# Altium PCB budzik.PcbDoc
Units mil, origin at the board's own origin, x right, y up, seen from the top; angles counter-clockwise.
Board outline 2204.72 x 2598.43 mil, 2 copper layers (Top Layer, Bottom Layer); 40 components, 44 nets, 162 pads, 33 vias.
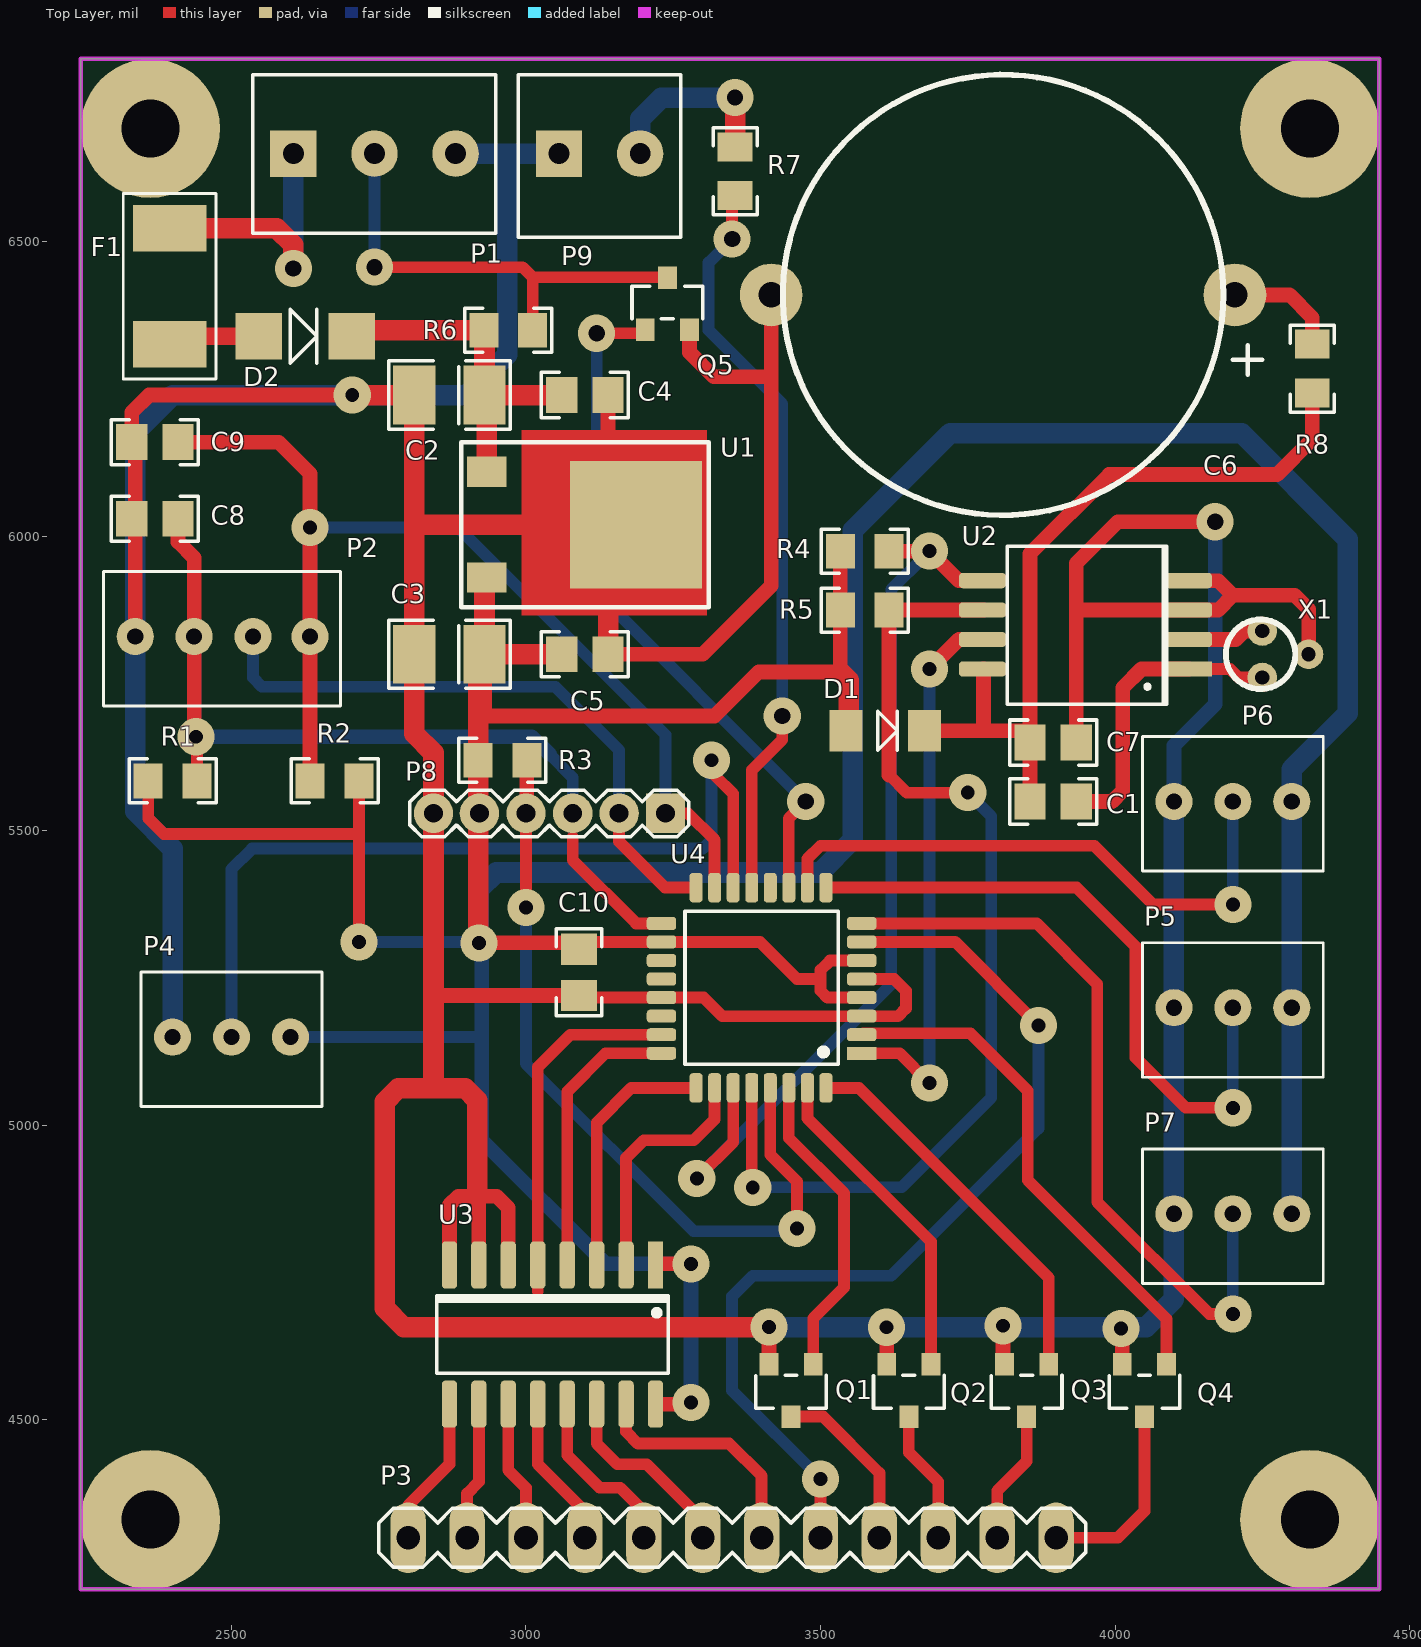
[diagram p0: Top Layer view]
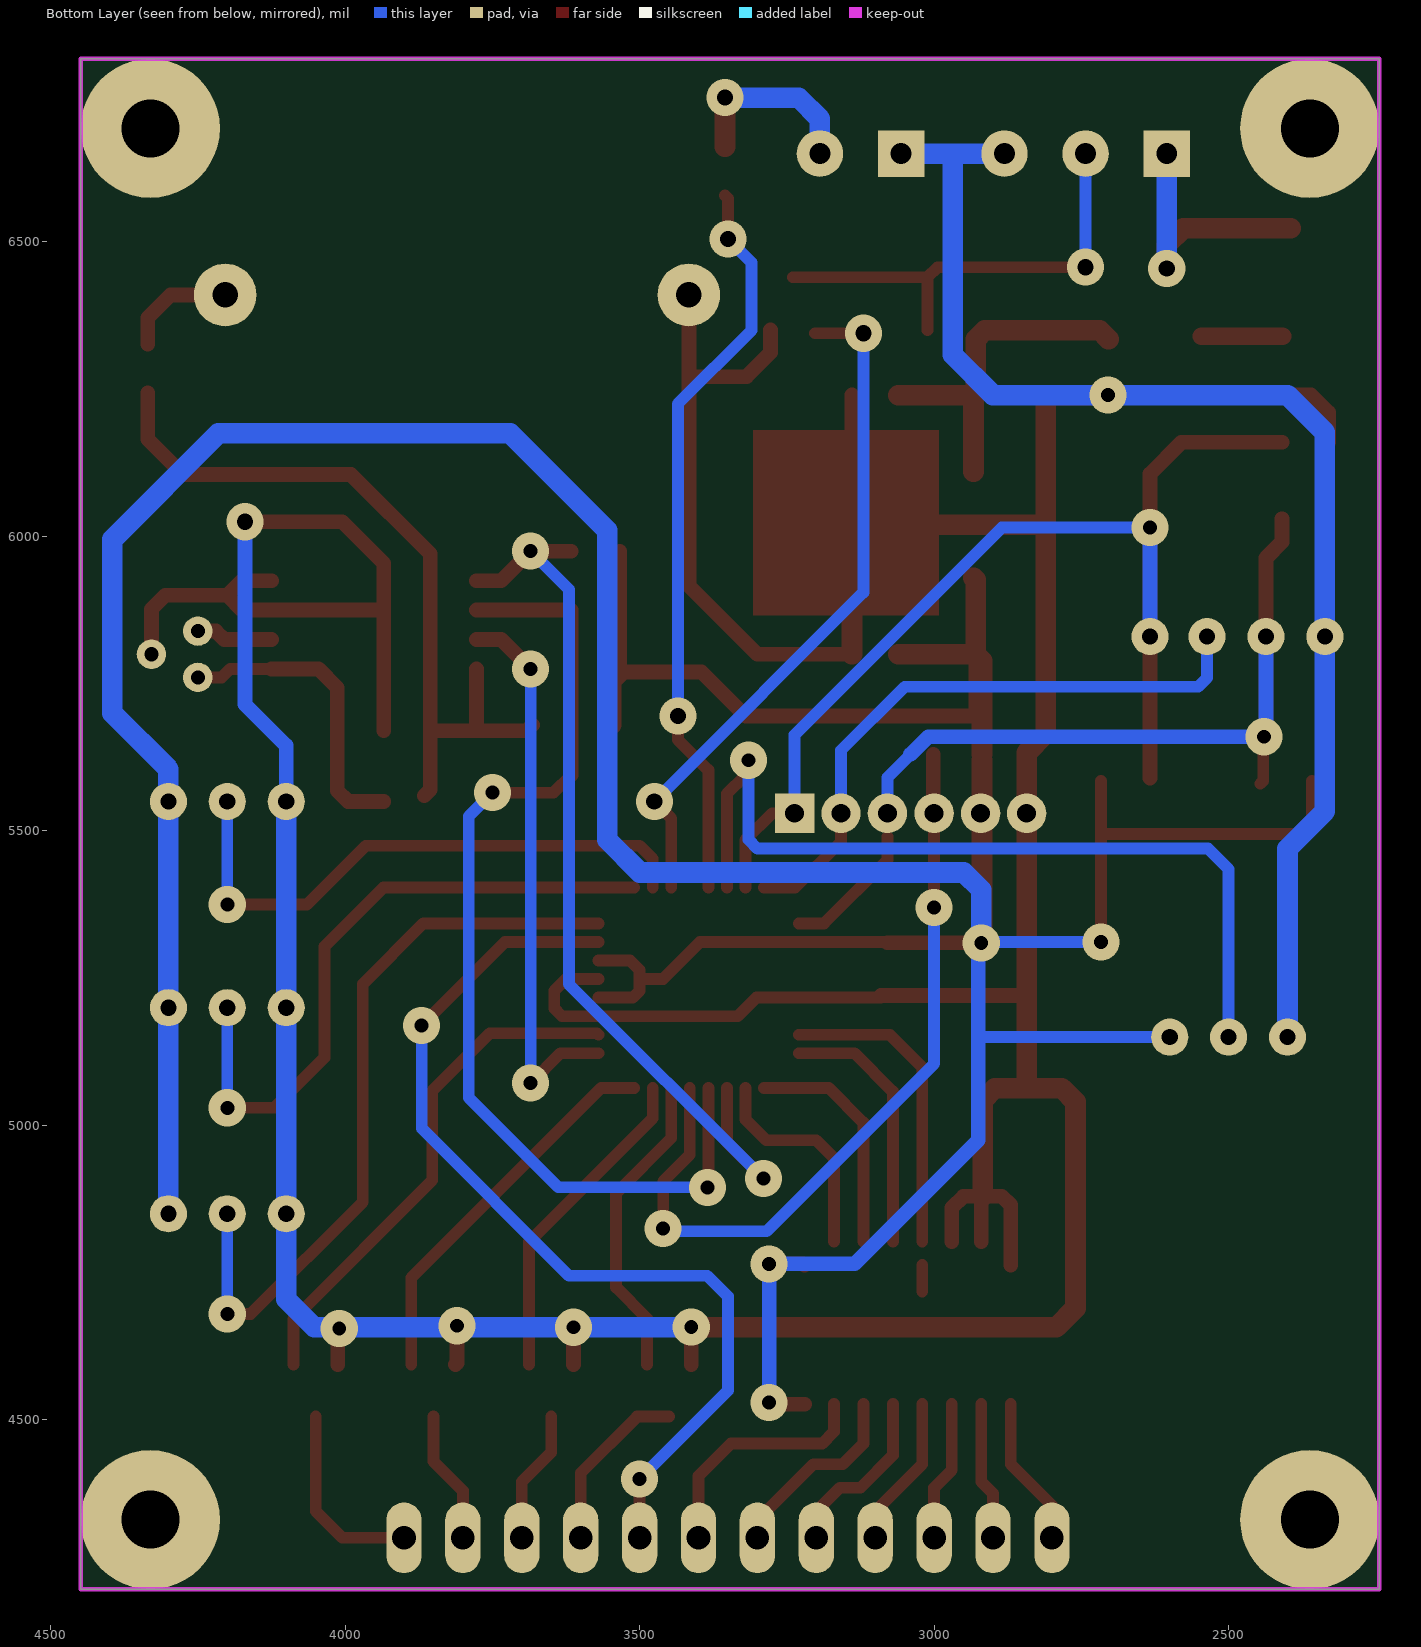
[diagram p1: Bottom Layer view, seen from below]

## Layer stack, top to bottom
Top Layer: signal copper 1.4
Dielectric: dielectric 12.6, FR-4, Dk 4.8
Bottom Layer: signal copper 1.4

## Board outline
2244.09,4212.6 4448.82,4212.6 4448.82,6811.02 2244.09,6811.02

## Design rules (kind name [scope] priority, off if disabled: settings)
Clearance [All] p1: gap=8
PolygonConnect [All] p1: connectstyle=Relief reliefconductorwidth=10 reliefentries=4 polygonreliefangle="90 Angle" airgapwidth=10
RoutingVias [All] p1: holewidth=27.56 width=62.99 viastyle="Through Hole" minholewidth=27.56 minwidth=62.99 maxholewidth=27.56 maxwidth=62.99
SolderMaskExpansion [All] p1: expansion=4
Width [All] p1: maxlimit=35 minlimit=20 preferedwidth=25 minimp=50.000000 maximp=50.000000 favimp=50.000000
28 further rules are at their usual default settings.

## Components (designator, comment, footprint, x,y, rotation, side; value= is the part's Value field where it differs from the comment)
C1 "22pF" C0805 3895,5550 r0 top
C2 "4,7uF" TANC_B 2870,6240 r180 top
C3 "10uF" TANC_B 2870,5800 r180 top
C4 "100nF" C0805 3100,6240 r0 top
C5 "100nF" C0805 3100,5800 r0 top
C6 "1.5F/5.5V" EECS5R5H155 3810,6410 r180 top
C7 "100nF" C0805 3895,5650 r0 top
C8 "100nF" C0805 2370,6030 r180 top
C9 "100nF" C0805 2370,6160 r180 top
C10 "100nF" C0805 3090,5260 r270 top
D1 "LL101A-GS08" SOD80C 3610,5670 r180 top
D2 "M4" SMA 2625,6340 r180 top
F1 "0679-0500-01" 0679-0500-01 2395,6425 r270 top
P1 "ARK 3-Pin" ARK-3.5mm-3pin 2605,6650 r0 top
P2 "NS25-W4P" NS25-W4P 2485,5830 r0 top
P3 "Header 12" MA12-1L 3350,4300 r0 top
P4 "NS25-W3P" NS25-W3P 2500,5150 r0 top
P5 "NS25-W3P" NS25-W3P 4200,5200 r0 top
P6 "NS25-W3P" NS25-W3P 4200,5550 r0 top
P7 "NS25-W3P" NS25-W3P 4200,4850 r0 top
P8 "Header 6 2mm" MA06-1_2mm 3040,5530 r180 top
P9 "ARK 2-Pin" ARK-3.5mm-2pin 3125,6650 r0 top
Q1 "2N7002" SOT23 3450,4550 r180 top
Q2 "2N7002" SOT23 3650,4550 r180 top
Q3 "2N7002" SOT23 3850,4550 r180 top
Q4 "2N7002" SOT23 4050,4550 r180 top
Q5 "2N7002" SOT23 3240,6395 r0 top
R1 "10K" R0805 2400,5585 r180 top
R2 "10K" R0805 2675,5585 r0 top
R3 "10K" R0805 2960,5620 r0 top
R4 "10K" R0805 3575,5975 r180 top
R5 "10K" R0805 3575,5875 r180 top
R6 "10K" R0805 2970,6350 r180 top
R7 "330R" R0805 3355,6620 r90 top
R8 "100R" R0805 4335,6285 r90 top
U1 "MC7805CDTG" TO-252 3060,6020 r270 top
U2 "PCF8583" SO-8T 3950,5850 r180 top
U3 "MC14543BDG" SO-16 3045,4645 r270 top
U4 "ATmega8-AU/MU" TQFP-32A 3400,5233.78 r180 top
X1 "32.768 KHz" TC26_V 4250,5800 r270 top

## Footprints (in the part's own frame and the unit in brackets; to place one, negate y for a bottom-side part, rotate by r counter-clockwise, add the part's x,y. Pads: shape width x height; smd on the part's side, far side on the other; paste and mask are expansions set on the pad)
0679-0500-01 [mm]
  rect 2x3.18 smd: 1(-2.5,0) 2(2.5,0)
  silkscreen extent -4,-2 4,2, body extent -3.05,-1.3 3.05,1.39, height 2.69
ARK-3.5mm-2pin [mm]
  rect 2x2 hole 0.9: 1(-1.75,0)
  round 2 hole 0.9: 2(1.75,0)
  silkscreen extent -3.5,-3.6 3.5,3.4, body extent -3.5,-3.6 3.5,3.4, height 8.4
ARK-3.5mm-3pin [mm]
  rect 2x2 hole 0.9: 1(0,0)
  round 2 hole 0.9: 2(3.5,0) 3(7,0)
  silkscreen extent -1.75,-3.43 8.73,3.4, body extent -1.76,-3.43 8.74,3.47, height 2.1
C0805 [mm] "Chip Capacitor, Body 2.0x1.2mm, Height 1.3mm, IPC Low Density"
  rect 1.35x1.55 smd: 1(-1,0) 2(1,0)
  silkscreen extent -1.88,-0.97 1.88,0.97, body extent -1.1,-0.72 1.1,0.72, height 1.3
EECS5R5H155 [mm] "1,5F; 5,5VDC; O20,5x6,5mm"
  round 2.7 hole 1.1: 1(-10,0) 2(10,0)
  silkscreen extent -11.18,-9.5 9.5,9.5, body extent -10,-9.48 10.1,9.48, height 6.2
MA06-1_2mm [mm]
  rect 1.7x1.7 hole 0.813: 1(-5,0)
  round 1.7 hole 0.813: 2(-3,0) 3(-1,0) 4(1.016,0) 5(3.023,0) 6(5.004,0)
  silkscreen extent -6,-1 6.02,1.02
MA12-1L [mil]
  oval 60x120 hole 40: 1(-550,0) 2(-450,0) 3(-350,0) 4(-250,0) 5(-150,0) 6(-50,0) 7(50,0) 8(150,0) 9(250,0) 10(350,0) 11(450,0) 12(550,0)
  silkscreen extent -600,-50 600,50, body extent -600,-50 600,50, height 339
NS25-W3P [mm]
  round 1.6 hole 0.7: 1(-2.54,0) 2(0,0) 3(2.54,0)
  silkscreen extent -3.9,-3 3.9,2.8, body extent -3.9,-3 3.9,2.8, height 11.5
NS25-W4P [mm]
  round 1.6 hole 0.7: 1(-3.77,0) 2(-1.23,0) 3(1.31,0) 4(3.77,0)
  silkscreen extent -5.13,-3 5.08,2.8, body extent -5.13,-3 5,2.8, height 11.5
R0805 [mm] "Chip Resistor, Body 2.0x1.3mm, IPC Low Density"
  rect 1.25x1.5 smd: 1(-1.05,0) 2(1.05,0)
  silkscreen extent -1.88,-0.95 1.88,0.95, body extent -1.1,-0.67 1.1,0.67, height 0.7
SMA [mil]
  rect 79x79 smd: 1(-78.87,0) 2(78.87,0)
  silkscreen extent -20,-46 26,46, body extent -98,-53 98,53, height 87
SO-8T [mil]
  rect 80x26 smd: 1(-175,75)
  rrect50% 80x26 smd: 2(-175,25) 3(-175,-25) 4(-175,-75) 5(175,-75) 6(175,-25) 7(175,25) 8(175,75)
  silkscreen extent -138,-133 133,135, body extent -204,-151 204,151, height 110
SO-16 [mil]
  rect 80x26 smd: 1(-118.11,175)
  rrect50% 80x26 smd: 2(-118.11,125) 3(-118.11,75) 4(-118.11,25) 5(-118.11,-25) 6(-118.11,-75) 7(-118.11,-125) 8(-118.11,-175) 9(118.11,-175) 10(118.11,-125) 11(118.11,-75) 12(118.11,-25) 13(118.11,25) 14(118.11,75) 15(118.11,125) 16(118.11,175)
  silkscreen extent -66,-197 66,197, body extent -121,-196 121,196, height 68
SOD80C [mil]
  rect 56x71 smd: 1(-66.96,0) 2(66.96,0)
  silkscreen extent -20,-33 13,33, body extent -69,-30 69,30, height 59
SOT23 [mil]
  rect 32x38 smd: 1(-37.6,-44.33) 2(37.6,-44.33) 3(0,44.33)
  silkscreen extent -60,-26 60,30, body extent -57,-49 57,48, height 40
TANC_B [mil]
  rect 72x100 smd: 1(-59.53,0) 2(59.53,0)
  silkscreen extent -103,-58 103,58, body extent -69,-55 70,55, height 75
TC26_V [mil]
  round 50 hole 24: 1(-39.37,0) 2(39.37,0) 3(0,78.74)
  silkscreen extent -59,-62 59,56, body extent -59,-62 59,56, height 315
TO-252 [mm]
  rect 1.3x1.7 smd: 1(-2.285,-3.22) 3(2.285,-3.22)
  rect 5.5x5.7 smd: 2(0,3.22)
  silkscreen extent -3.56,-4.32 3.56,6.35, body extent -3.29,-3.95 3.29,5.75, height 2.3
TQFP-32A [mil]
  rect 50x22 smd: 1(-170,111.22)
  rrect50% 50x22 smd: 2(-170,79.72) 3(-170,48.23) 4(-170,16.73) 5(-170,-14.76) 6(-170,-46.26) 7(-170,-77.76) 8(-170,-109.25) 17(170,-109.25) 18(170,-77.76) 19(170,-46.26) 20(170,-14.76) 21(170,16.73) 22(170,48.23) 23(170,79.72) 24(170,111.22)
  rrect50% 22x50 smd: 9(-109.25,-170) 10(-77.76,-170) 11(-46.26,-170) 12(-14.76,-170) 13(16.73,-170) 14(48.23,-170) 15(79.72,-170) 16(111.22,-170) 25(111.22,170) 26(79.72,170) 27(48.23,170) 28(16.73,170) 29(-14.76,170) 30(-46.26,170) 31(-77.76,170) 32(-109.25,170)
  silkscreen extent -130,-130 130,130, body extent -180,-180 182,182, height 47

## Part data
C1 C4 C5 C7 C8 C9 C10: library part Cap, "Capacitor"
C2 C3 C6: library part Cap_Pol, "Capacitor Polarized"
D1: library part "Diode Shottky"
D2: library part Diode
F1: "Bezpiecznik: topikowy; szybki; ceramiczny; 500mA; 125VAC; 125VDC"
P3: "Header, 12-Pin"
P8: library part "Header 6", "Header, 6-Pin"
Q1 Q2 Q3 Q4 Q5: library part 2N7002(GSD), "N-MOSFET"
R1 R2 R3 R4 R5 R6 R7 R8: library part Res, "Resistor"
U1: library part 78xx
U3: "BCD na 7 segmentowy"
U4: "TQFP - 32pin / MLF - 32pin"
X1: library part "Crystal _GND"

## Free pads (board coordinates)
  round 236.22 hole 98.43: M(2362.2,4330.71) M(2362.2,6692.91) M(4330.71,4330.71) M(4330.71,6692.91)

## Via types
v1: diameter 62.99, hole 23.62, Top Layer to Bottom Layer, 25 vias
v2: diameter 62.99, hole 27.56, Top Layer to Bottom Layer, 8 vias

## Nets (pads, with @x,y where several pads share a name; then routed paths per layer and width w, separated by ;. In a path a pad name is that pad's centre, name@x,y a point inside that pad or via, vN(x,y) a via of type N, cw(c..) or ccw(c..) an arc to the next point about the centre after c; other vN are vias at no path point)
5V: C3.1 C5.1 C10.1 D1.2 P4.3 P5.3 P6.3 P7.3 P8.5 R1.2 R2.2 R3.1 R4.2 R5.2 U1.3 U3.1 U3.16 U4.4 U4.6 U4.18 | length 8538.1
  Top Layer w20: R1.2 2358.66,5521.34 2385,5495 2711.34,5495 ; v1(2716.54,5311.54) R2.2@2716.54,5584.8 ; R3.1@2921,5620 R3.1@2921,5627.66 ; C10.1@3079.37,5311.54 U4.18 3397.24,5311.54 3460,5248.78 3500,5248.78 ; U4.4 3511.73,5217.05 3500,5228.78 3500,5248.78 ; U4.6 3516.26,5280.04 3500,5263.78 3500,5248.78
  Top Layer w25: R3.1@2918.66,5630 R3.1@2921,5627.66 ; v1(2920,5310) C10.1@3079.37,5310 ; U1.3 2933.23,5803.7 C3.1 2929.53,5695 3320,5695 3395,5770 3533.66,5770 R4.2 ; U3.16 3276.89,4526.89 v1(3280,4530) ; U3.1 3221.89,4765 v1(3280,4765)
  Top Layer w35: R3.1 2918.66,5321.34 v1@2925,5315 ; R3.1@2918.66,5630 2918.66,5789.13 C3.1 ; U1.3 2929.53,5926.34 C3.1 ; C5.1 C3.1 ; 3533.66,5770 3548.04,5755.63 D1.2@3548.04,5680
  Bottom Layer w20: P4.3 2925,5150 ; v1(2716.54,5311.54) 2920,5311.54 v1@2925,5311.54
  Bottom Layer w25: v1@2925,5311.54 2925,5150 2925,4975 3135,4765 v1(3280,4765) ; v1(3280,4530) v1@3280,4760
  Bottom Layer w35: v1(2920,5310) 2920,5311.54 2920,5400 2949.5,5429.5 3499.5,5429.5 3555,5485 3555,6010 3720,6175 4215,6175 4395,5995 4395,5700 4300,5605 P6.3 P5.3 P7.3
12V: C2.1 C4.1 D2.1 R6.2 U1.1 | length 595.5
  Top Layer w35: D2.1@2703.87,6335 2718.87,6350 2914.05,6350 2929.53,6334.53 C2.1 ; U1.1 2933.23,6236.3 C2.1 ; C4.1 C2.1
A: U3.5 U4.23 | length 573.7
  Top Layer w20: 3020,4718.11 U3.5 ; 3020,4803.11 3020,5099.06 3075,5154.06 U4.23
B: U3.2 U4.26 | length 372.7
  Top Layer w20: 3170,4803.11 3170,4945 3200,4975 3285,4975 3320.28,5010.28 U4.26
C: U3.3 U4.25 | length 395
  Top Layer w20: 3120,4803.11 3120,5005 3178.78,5063.78 U4.25
CC1: Q4.1 U4.2 | length 885.7
  Top Layer w20: U4.2 3572.44,5156.5 3754.5,5156.5 3852,5059 3852,4907 4087.6,4671.4 Q4.1
CC2: Q3.1 U4.32 | length 659
  Top Layer w20: U4.32 3565.22,5063.78 3887.6,4741.4 Q3.1
CC3: Q2.1 U4.31 | length 556.4
  Top Layer w20: U4.31 3477.76,5012.24 3687.6,4802.4 Q2.1
CC4: Q1.1 U4.30 | length 530
  Top Layer w20: U4.30 3446.26,4978.74 3540,4885 3540,4725 3487.6,4672.6 Q1.1
D: U3.4 U4.24 | length 441.4
  Top Layer w20: 3070,4803.11 3070,5057.56 3135,5122.56 U4.24
DP: P3.8 U4.7 | length 1643.8
  Top Layer w20: P3.8 v1(3500,4400) ; U4.7 3728.46,5311.54 v1(3870,5170)
  Bottom Layer w20: v1(3500,4400) 3350,4550 3350,4710 3385,4745 3620,4745 3870,4995 v1(3870,5170)
EN_A: C9.1 P2.4 P8.1 R2.1 U4.15 | length 2013.4
  Top Layer w20: v1@2633.43,5995 v1(2633.43,6015) ; P8.1 3275,5530 3320.28,5484.72 U4.15
  Top Layer w25: C9.1 2580,6160 2633.43,6106.57 v1(2633.43,6015) ; R2.1@2633.43,5589.76 P2.4 v1@2633.43,5995
  Bottom Layer w20: v1(2633.43,6015) 2885,6015 3236.85,5663.15 P8.1
  Bottom Layer w25: P2.4 v1(2633.43,6015)
EN_B: C8.1 P2.2 P8.3 R1.1 U4.17 | length 1595.2
  Top Layer w20: v1@2436.57,5663.43 2441.34,5658.66 R1.1 R1.1@2446.34,5580 ; 3079.37,5490 3079.37,5450.63 3186.97,5343.03 U4.17
  Top Layer w25: C8.1 2409.37,5990.63 2436.57,5963.43 P2.2 v1@2436.57,5663.43
  Bottom Layer w20: 3040,5630 3079.37,5590.63 P8.3
  Bottom Layer w25: v1@2436.57,5663.43 P2.2 ; v1(2440,5660) 3010,5660 3040,5630
EN_SW: P2.3 P8.2 U4.16 | length 1060.6
  Top Layer w20: P8.2 3158.11,5481.89 3236.22,5403.78 U4.16
  Bottom Layer w20: P2.3 2536.57,5760 2551.57,5745 3050,5745 3158.11,5636.89 P8.2
GND: C2.2 C3.2 C4.2 C5.2 C6.2 C7.2 C8.2 C9.2 C10.2 P1.3 P2.1 P4.1 P5.1 P6.1 P7.1 P8.6 P9.1 Q1.2 Q2.2 Q3.2 Q4.2 Q5.2 U1.2 U2.3 U2.4 U3.6 U3.7 U3.8 U4.3 U4.5 U4.21 X1.3 | length 12315.1
  Top Layer w20: C10.2@3090,5217.05 U4.21 3301.73,5217.05 3333.23,5185.55 U4.3 3631.77,5185.55 3645,5198.78 3645,5228.78 3625.24,5248.54 U4.5
  Top Layer w25: P2.1 2336.57,6154.06 C9.2 2330.63,6210.63 2360,6240 v1(2705,6240) ; 2843,5220 2843.63,5220.63 C10.2 ; U3.8 2870,4865 2885,4880 2917.5,4880 ; 2920,4803.11 2920,4877.5 2917.5,4880 ; 2970,4803.11 2970,4860 2950,4880 2917.5,4880 ; C5.2 3300,5800 3416.3,5916.3 3416.3,6271.3 ; U1.2@3139.37,5972.6 U1.2 ; U1.2@3139.37,6067.4 C4.2 ; Q5.2 3277.6,6312.4 3318.7,6271.3 3416.3,6271.3 ; Q1.2 v1(3412.4,4657.6) ; C6.2 3416.3,6271.3 ; Q2.2 v1(3612.4,4657.4) ; v1(3810,4660) 3810,4596.73 Q3.2 ; C7.2@3934.37,5670 3934.37,5880 ; v1(4010,4655) 4012.4,4652.6 Q4.2 ; U2.4 4175,5925 4200,5900 ; v2(4170,6025) 4005,6025 3934.37,5954.37 3934.37,5880 ; X1.3 4328.74,5876.26 4305,5900 4200,5900 ; 3934.37,5880 3939.37,5875 U2.3 4175,5875 4200,5900
  Top Layer w35: v1(2705,6240) C2.2 2810.47,6020 ; 2917.5,4880 2917.5,5042.5 2897,5063 2843,5063 ; C5.2 U1.2@3139.37,5972.6 ; v1(3412.4,4657.6) 2792.4,4657.6 2760,4690 2760,5040 2783,5063 2843,5063 ; 2810.47,6020 C3.2 2810.47,5665 2843,5632.47 P8.6 2843,5220 2843,5063 ; 2810.47,6020 U1.2@3139.37,6020 ; U1.2@3139.37,6020 U1.2 3139.37,6067.4 U1.2@3139.37,6020
  Bottom Layer w25: P6.1 4100,5645 4170,5715 v2(4170,6025)
  Bottom Layer w35: P4.1 2400,5470 2336.57,5533.43 P2.1 2336.57,6176.57 2400,6240 v1(2705,6240) 2900,6240 2968.35,6308.35 2968.35,6650 ; P1.3 2968.35,6650 ; P9.1 2968.35,6650 ; v1(3412.4,4657.6) 4052.6,4657.6 4100,4705 P7.1 P5.1 P6.1
INT: U2.7 U4.1 | length 951.5
  Top Layer w20: U4.1 3634.44,5122.56 v1(3685,5072)
  Top Layer w25: v1(3685,5775) 3735,5825 U2.7@3776.89,5825
  Bottom Layer w20: v1(3685,5072) v1(3685,5775)
LED: P7.2 U4.8 | length 1291.4
  Top Layer w20: U4.8 3866.97,5343.03 3970,5240 3970,4870 4160,4680 v1(4200,4680)
  Bottom Layer w20: v1(4200,4680) P7.2
NetC1_1: C1.1 C7.1 D1.1 R8.1 U2.8 | length 1336.1
  Top Layer w25: D1.1@3681.96,5680 3691.96,5670 3776.89,5670 ; U2.8@3776.89,5775 3776.89,5670 ; C1.1@3865.63,5560 3855.63,5570 C7.1@3855.63,5670 ; R8.1 4335,6165 4275,6105 3990,6105 3855.63,5970.63 C7.1@3855.63,5670 ; 3776.89,5670 C7.1@3855.63,5670
NetC1_2: C1.2 U2.1 X1.2 | length 517.3
  Top Layer w20: U2.1 4195,5775 4209.37,5760.63 X1.2
  Top Layer w25: C1.2 3995,5550 4013.11,5568.11 4013.11,5743.11 4045,5775 U2.1
NetC6_1: C6.1 R8.2 | length 199.4
  Top Layer w20: C6.1@4205,6405 C6.1@4210,6410
  Top Layer w25: C6.1 4210,6410 4296.34,6410 4335,6371.34 R8.2
NetD2_2: D2.2 F1.2 | length 142.7
  Top Layer w20: D2.2@2546.13,6335 D2.2
  Top Layer w30: F1.2@2408.43,6340 D2.2
NetF1_1: F1.1 P1.1 | length 456.8
  Top Layer w35: F1.1 2576.57,6523.43 2605,6495 v2(2605,6455)
  Bottom Layer w35: v2(2605,6455) P1.1
NetP3_1: P3.1 U3.9 | length 312.8
  Top Layer w20: P3.1 2800,4355 2870,4425 U3.9 2870,4470
NetP3_2: P3.2 U3.10 | length 235.2
  Top Layer w20: P3.2 2900,4375 2920,4395 U3.10
NetP3_3: P3.3 U3.11 | length 239.3
  Top Layer w20: U3.11 2970,4415 3000,4385 P3.3
NetP3_4: P3.4 U3.12 | length 260
  Top Layer w20: U3.12 3020,4425 3100,4345 P3.4
NetP3_5: P3.5 U3.13 | length 301.2
  Top Layer w20: U3.13 3070,4440 3125,4385 3160,4385 3200,4345 P3.5
NetP3_6: P3.6 U3.14 | length 330.7
  Top Layer w20: U3.14 3120,4460 3155,4425 3205,4425 3300,4330 P3.6
NetP3_7: P3.7 U3.15 | length 413
  Top Layer w20: U3.15 3170,4480 3190,4460 3345,4460 3400,4405 P3.7
NetP3_9: P3.9 Q1.3 | length 299.6
  Top Layer w20: Q1.3 3504.33,4505.67 3600,4410 P3.9
NetP3_10: P3.10 Q2.3 | length 226.4
  Top Layer w20: Q2.3 3650,4445 3700,4395 P3.10
NetP3_11: P3.11 Q3.3 | length 226.4
  Top Layer w20: P3.11 3800,4380 3850,4430 Q3.3
NetP3_12: P3.12 Q4.3 | length 329.3
  Top Layer w20: P3.12 4005,4300 4050,4345 Q4.3
NetP9_2: P9.2 R7.2 | length 318.6
  Top Layer w35: R7.2 v2(3355,6745)
  Bottom Layer w35: P9.2 3193.9,6708.9 3230,6745 v2(3355,6745)
NetU2_2: U2.2 X1.1 | length 131
  Top Layer w25: U2.2 4205,5825 4219.37,5839.37 X1.1
OUT_H: P1.2 Q5.3 R6.1 | length 787.1
  Top Layer w20: v2(2742.8,6457.2) 2994.13,6457.2 3011.34,6440 ; R6.1 3011.34,6440 ; Q5.3@3240,6440 3011.34,6440
  Bottom Layer w20: v2(2742.8,6457.2) P1.2
OUT_L: Q5.1 U4.11 | length 1187
  Top Layer w20: v2(3120,6345) Q5.1@3202.4,6345 ; U4.11 3446.26,5521.26 v2(3475,5550) ; v2@3467.5,5557.5 v2@3475,5565
  Bottom Layer w20: v2(3120,6345) 3120,5905 3460,5565 v2@3475,5565
RST: P8.4 R3.2 U4.29 | length 1392.8
  Top Layer w20: v1(3000,5370) P8.4 ; U4.29 3414.76,4950.24 3460,4905 v1(3460,4825)
  Top Layer w25: P8.4 3001.34,5531.34 R3.2@3001.34,5630
  Bottom Layer w20: v1(3000,5370) 3000,5385 3000,5105 3284.5,4820.5 3455.5,4820.5 v1(3460,4825)
SCL: R5.1 U2.6 U4.28 | length 1758.7
  Top Layer w20: U4.28 3383.27,4915 3385,4913.27 v1(3385,4895) ; 3616.34,5595 3646.34,5565 v1(3750,5565)
  Top Layer w25: 3616.34,5595 R5.1 U2.6@3776.89,5875
  Bottom Layer w20: v1(3385,4895) 3638,4895 3790,5047 3790,5525 v1(3750,5565)
SDA: R4.1 U2.5 U4.27 | length 1593.6
  Top Layer w20: v1(3290,4910) 3351.77,4971.77 U4.27
  Top Layer w25: R4.1 v1(3685,5975) 3735,5925 U2.5 U2.5@3776.89,5925
  Bottom Layer w20: v1(3290,4910) 3620,5240 3620,5910 3677.5,5967.5 v1@3677.5,5982.5
SENSOR_LEFT: P4.2 U4.14 | length 1448.8
  Top Layer w20: v1@3320.89,5594.11 3351.77,5563.23 U4.14
  Bottom Layer w20: P4.2 2500,5435 2535,5470 3300,5470 3315,5485 v1@3315,5610
  other v1: 3315,5620
SENSOR_RIGHT: P5.2 U4.9 | length 1126.2
  Top Layer w20: U4.9 3935,5403.78 4035,5303.78 4035,5115 4120,5030 v1(4200,5030)
  Bottom Layer w20: v1(4200,5030) P5.2
SENSOR_TOUCH: P6.2 U4.10 | length 996.9
  Top Layer w20: U4.10 3477.76,5452.76 3500,5475 3965,5475 4065,5375 v1(4200,5375)
  Bottom Layer w20: v1(4200,5375) P6.2
VIBR_OUT: R7.1 U4.13 | length 1266.7
  Top Layer w20: v2(3350,6505) 3350,6573.66 R7.1 ; U4.13 3383.27,5603.27 3435,5655 v2(3435,5695)
  Bottom Layer w20: v2(3350,6505) 3310,6465 3310,6350 3435,6225 v2(3435,5695)
pads on no net: U4.12 U4.19 U4.20 U4.22

## Keep-outs
Keep-Out Layer:
  the board outline again, w7.87

## Other copper
Top Layer:
  rectangle net GND: 2992.13,5866.14 3307.09,6181.1